# Altium PCB VAMoS PCB RevB.PcbDoc (part 3 of 3)
Units mm, origin at the board's own origin, x right, y up, seen from the top; angles counter-clockwise.
Board outline 96.93 x 94.75 mm, 4 copper layers (Top Signal Layer, Power Plane, Ground Plane, Bottom Signal Layer), stack 1.66 mm thick; 217 components, 103 nets, 623 pads, 255 vias.
Unrouted connection lines stored in the file: 51.
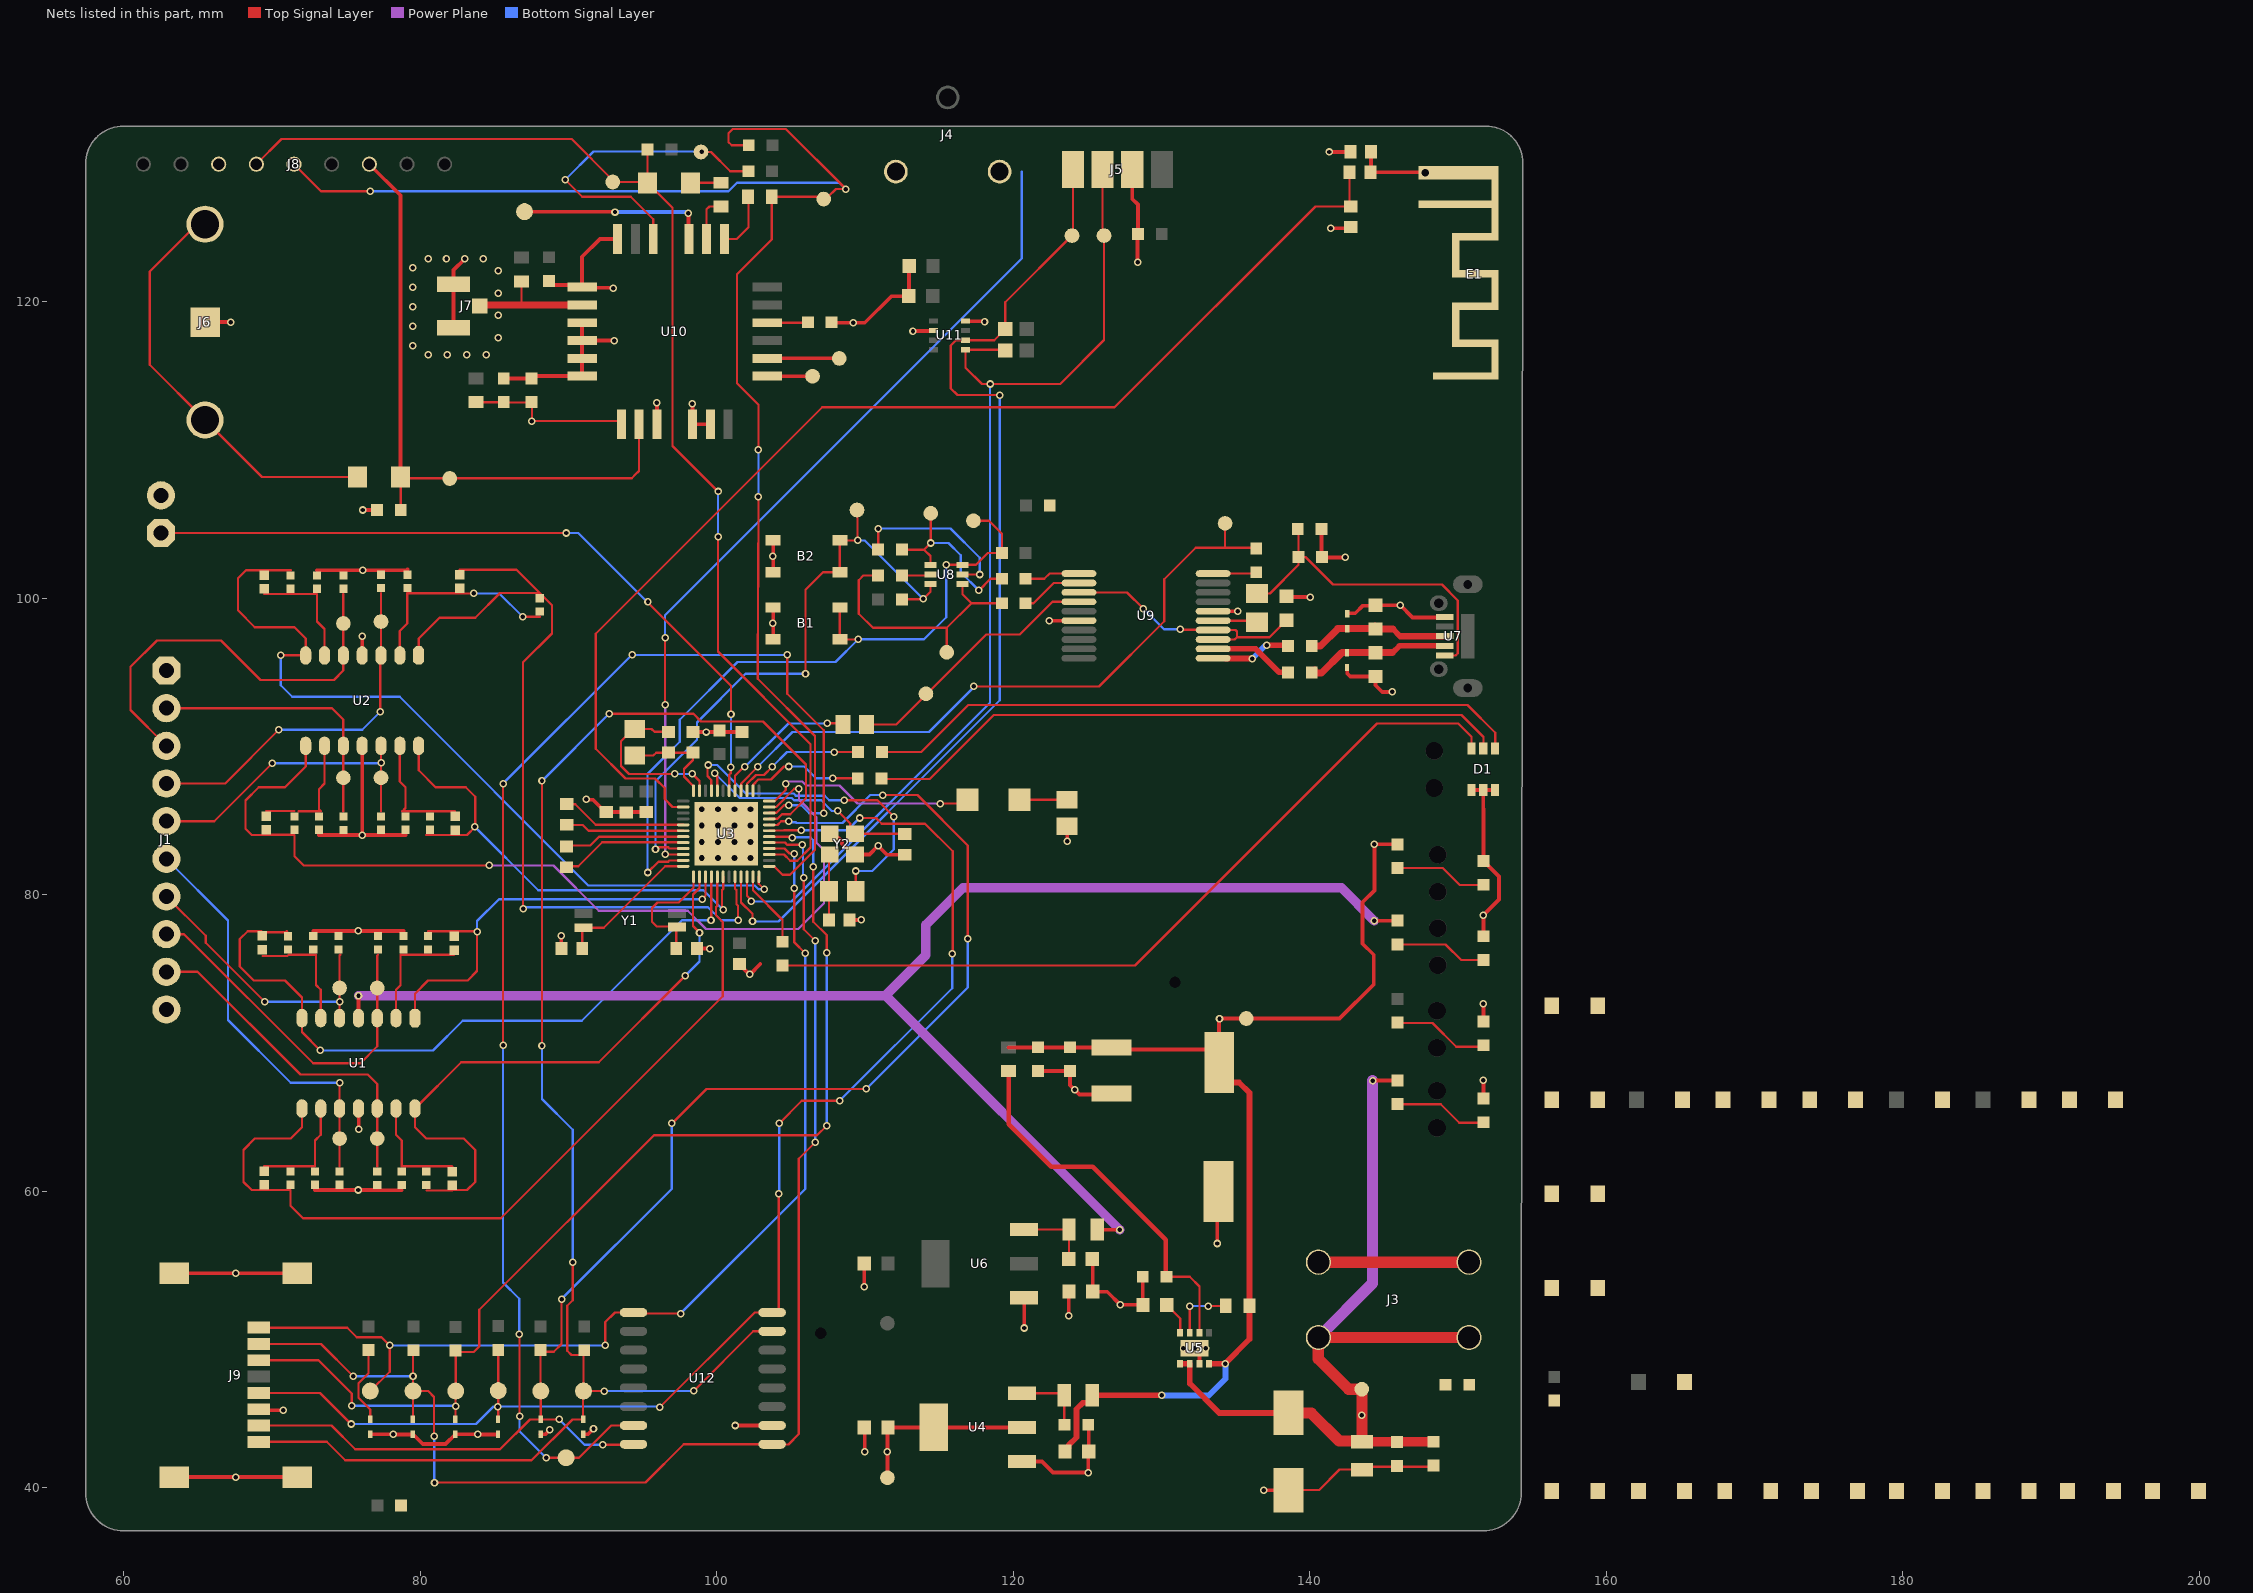
[diagram p4: the nets of this part, all layers, seen from the top]

## Via types
v1: diameter 0.508, hole 0.3, Top Signal Layer to Bottom Signal Layer, 238 vias
v2: diameter 0.7, hole 0.4, Top Signal Layer to Bottom Signal Layer, 16 vias
v3: diameter 0.7, hole 0.5, Top Signal Layer to Bottom Signal Layer, 1 vias

## Nets (pads, with @x,y where several pads share a name; then routed paths per layer and width w, separated by ;. In a path a pad name is that pad's centre, name@x,y a point inside that pad or via, vN(x,y) a via of type N, cw(c..) or ccw(c..) an arc to the next point about the centre after c; other vN are vias at no path point) (continued)
32K_XN: C16.2 U3.13 Y1.2 | length 8.3
  Top Signal Layer w0.152: C16.2@97.259,76.369 97.259,77.85 95.95,77.85 95.625,78.175 95.625,79.1 96,79.475 97.423,79.475 98.426,80.478 U3.13@98.426,81.216
32K_XP: C13.2 U3.12 Y1.1 | length 9.9
  Top Signal Layer w0.152: C13.2@90.912,76.369 90.912,77.687 Y1.1@90.999,77.774 92.374,77.774 96.516,81.916 U3.12@97.726,81.916
+5V: C22.2 C25.2 L2.1 R34.2 Tp9.1 U1.4 U2.4 U4.2 | length 116
  Top Signal Layer w0.254: U1.4@75.819,71.678 75.822,71.681 75.822,73.197 v1(75.825,73.2) ; U2.4@76.073,96.139 76.073,97.423 v1(76.075,97.425) ; Tp9.1@111.5,40.675 v1(111.5,42.425) 111.5,44.025 C22.2@111.544,44.069 U4.2@114.627,44.069 U4.2@120.577,44.069 ; v1(123.725,51.6) 123.725,53.2 C25.2@123.75,53.225 ; L2.1@125.652,57.416 125.668,57.4 v1(127.175,57.4) ; v1(144.325,78.25) R34.2@145.9,78.25
  Power Plane w0.635: v1(75.825,73.2) 111.375,73.2 ; v1(127.175,57.4) 111.375,73.2 ; v1(144.325,78.25) 143.227,79.348 143.227,79.377 142.128,80.475 116.6,80.475 114.1,77.975 114.1,75.925 111.375,73.2
+5V5: C17.2 C27.1 C28.2 C30.2 C31.2 L1.1 R33.2 R36.2 Tp11.1 U5.4 | length 79.1
  Top Signal Layer w0.254: 119.675,69.7 126.612,69.7 C28.2@126.615,69.697 126.752,69.56 133.006,69.56 C27.1@133.875,68.691 ; v1@133.875,71.65 C27.1@133.875,68.691 ; C27.1@133.879,68.687 C27.1@133.875,68.691 ; v1(133.9,71.65) Tp11.1@135.708,71.65 142,71.65 144.3,73.95 144.3,75.95 143.55,76.7 143.55,79.492 144.35,80.292 v1(144.35,83.4) R33.2@145.9,83.4
  Top Signal Layer w0.381: C17.2@123.475,42.45 123.735,42.71 123.735,42.885 124.25,43.4 124.25,45.3 124.675,45.725 125.104,45.725 125.323,45.944 L1.1@125.323,46.244 129.981,46.244 v1(130,46.225) ; U5.4@133.194,48.353 134.253,48.353 135.925,50.025 R36.2@135.925,52.275 135.925,66.641 135.227,67.339 134.688,67.339 133.879,68.148 C27.1@133.879,68.687
  Bottom Signal Layer w0.381: v1(130,46.225) 133.175,46.225 134.3,47.35 v1(134.3,48.35)
+12V: C19.1 C20.2 C21.2 C23.2 C55.2 D34.1 J3.2 R32.2 Tp10.1 U5.1 U5.2 | length 59.7
  Top Signal Layer w0.254: C20.2@143.474,43.15 C20.2@143.51,43.114 ; v1(144.225,67.45) 144.25,67.475 R32.2@145.9,67.475 ; C23.2@145.627,43.223 145.736,43.114 C23.2@145.9,42.95
  Top Signal Layer w0.381: U5.1@131.244,48.353 U5.2@131.894,48.353 ; U5.2@131.9,48.347 131.9,47.025 133.88,45.045 C19.1@138.557,45.045
  Top Signal Layer w0.635: C20.2@143.51,43.114 145.736,43.114 C21.2@148.161,43.114
  Top Signal Layer w0.762: C19.1@138.557,45.045 140.08,45.045 141.975,43.15 C20.2@143.474,43.15 ; Tp10.1@143.5,46.65 142.6,46.65 140.57,48.68 J3.2@140.57,50.135 J3.2@150.73,50.135 ; C20.2@143.51,43.114 v1(143.51,44.882) Tp10.1@143.51,46.65
  Power Plane w0.762: J3.2@140.57,50.135 144.225,53.79 v1(144.225,67.45)
CHIP_PU: B2.2 B2.4 R44.1 Tp14.1 U3.9 U8.3 | length 43
  Top Signal Layer w0.152: v1(95.858,83.058) 95.999,83.199 96.709,83.199 96.791,83.116 U3.9@97.726,83.116 ; v1(105.975,94.9) 105.975,100.575 107.15,101.75 B2.4@108.292,101.75 B2.2@108.292,103.9 v1(109.5,103.9) 109.475,103.925 109.475,105.925 Tp14.1@109.45,105.95 ; R44.1@112.475,99.925 113.9,99.925 v1(113.925,99.95) 114.407,100.432 U8.3@114.407,100.95
  Bottom Signal Layer w0.152: v1(95.858,83.058) 95.858,87.658 98.65,90.45 98.65,91.625 101.925,94.9 v1(105.975,94.9) v1@106,94.9 ; v1(109.5,103.9) 109.975,103.9 v1(113.925,99.95)
DIFF90_N: C34.2 D7.2 R41.2 U7.2 | length 10.1
  Top Signal Layer w0.381: R41.2@140.119,94.996 140.201,95.078 140.329,95.206 R41.2@140.329,94.95 ; 145.575,96.325 146.039,96.789 U7.2@149.098,96.789
  Top Signal Layer w0.478: R41.2@140.329,94.95 140.775,94.95 142.15,96.325 D7.2@142.5,96.325 C34.2@144.425,96.325 145.575,96.325
DIFF90_P: C35.2 D8.2 R42.2 U7.3 | length 9.8
  Top Signal Layer w0.381: C35.2@144.4,97.925 C35.2@144.425,97.925 ; 145.6,97.925 146.086,97.439
  Top Signal Layer w0.417: 146.086,97.439 U7.3@149.098,97.439
  Top Signal Layer w0.478: R42.2@140.119,96.774 140.724,96.774 141.892,97.942 141.878,97.95 D8.2@142.525,97.95 C35.2@144.375,97.95 ; C35.2@144.4,98.125 144.6,97.925 145.6,97.925
DTR: R40.2 R47.1 Tp16.1 U8.1 | length 12.5
  Top Signal Layer w0.152: R40.2@112.475,103.275 113.975,103.275 ; U8.1@114.407,102.25 114.407,102.843 113.975,103.275 ; Tp16.1@114.425,105.725 v1(114.425,103.725) 113.975,103.275 ; v1(117.675,100.525) 118.46,101.31 R47.1@119.222,101.31
  Bottom Signal Layer w0.152: v1(114.425,103.725) 115.625,103.725 116.45,102.9 116.45,101.75 v1(117.675,100.525)
GND: B1.1 B1.3 B2.1 B2.3 C11.1 C13.1 C14.2 C15.2 C16.1 C17.1 C18.1 C19.2 C20.1 C21.1 C22.1 C23.1 C24.1 C25.1 C26.1 C27.2 C28.1 C29.1 C30.1 C31.1 C32.1 C33.1 C34.1 C35.1 C36.1 C37.1 C38.1 C39.1 C40.1 C41.1 C42.1 C43.1 C44.1 C44.2 C45.1 C46.2 C47.1 C48.1 C49.1 C50.1 C52.1 C53.1 C54.1 C55.1 C56.1 D1.1 D1.2 D1.3 D3.2 D4.2 D5.2 D6.2 D7.1 D8.1 D11.1 D12.1 D13.1 D14.1 D15.1 D16.1 D17.2 D18.2 D19.2 D20.2 D21.2 D22.2 D23.2 D24.2 D25.2 D26.2 D27.2 D28.2 D29.2 D30.2 D31.2 D32.2 D33.2 D34.2 D35.2 E1.1 J1.1 J1.10 J2.2 J3.1 J4.3 J5.2 J6.2 J7.GND J8.7 J9.6 J9.9 J9.10 J9.11 J9.12 L3.1 R1.1 R2.1 R3.1 R4.1 R5.1 R6.1 R7.1 R8.1 R13.1 R14.1 R15.1 R16.1 R17.1 R18.1 R19.1 R20.1 R30.1 R38.1 R53.1 U1.11 U2.11 U3.49 U4.1 U5.3 U6.1 U7.5 U9.6 U9.16 U10.1 U10.3 U10.4 U10.5 U10.6 U10.9 U10.10 U10.11 U10.24 U11.1 U11.7 U12.10 Y2.2 Y2.4 | length 234.4
  Top Signal Layer w0.152: C19.2@138.557,39.845 140.62,39.845 142,41.225 143.499,41.225 C20.1@143.51,41.214 143.721,41.425 148.15,41.425 C21.1@148.35,41.225
  Top Signal Layer w0.254: J9.10@63.388,40.718 v1(67.538,40.718) J9.9@71.688,40.718 ; J9.11@63.388,54.468 v1(67.538,54.468) J9.12@71.688,54.468 ; J6.2@65.475,118.625 v1(67.2,118.625) ; J9.6@69.088,45.298 69.161,45.225 v1(70.75,45.225) ; 72.771,77.558 74.474,77.558 v1(75.807,77.558) 77.141,77.558 78.867,77.558 ; 72.898,60.083 74.536,60.083 74.549,60.07 ; 73.025,101.892 74.803,101.892 79.083,101.892 79.121,101.93 ; 73.152,84.036 v1@76.075,84.036 ; 74.549,60.083 v1(75.813,60.083) 77.076,60.083 77.089,60.07 78.74,60.07 ; U1.11@75.819,65.582 75.835,65.566 75.835,64.19 v1(75.85,64.175) ; U2.11@76.073,90.043 U2.11@76.073,90.043 76.074,84.037 v1@76.075,84.036 ; v1(76.1,105.95) C38.1@77.075,105.95 ; D16.1@76.623,43.611 78.164,43.611 v1(78.175,43.6) 79.482,43.6 D15.1@79.493,43.611 80.16,42.944 81.697,42.944 D14.1@82.364,43.611 83.864,43.611 v1(83.875,43.6) 85.223,43.6 D13.1@85.234,43.611 ; 78.994,84.036 77.343,84.036 v1@76.075,84.036 ; J7.GND@82.231,118.236 J7.GND@82.231,121.186 82.231,122.131 v1(83,122.9) ; C41.1@85.625,114.825 C40.1@87.5,114.825 87.658,114.983 U10.6@90.905,114.983 U10.5@90.905,116.183 U10.4@90.905,117.383 ; D12.1@88.105,43.611 88.436,43.611 v1(88.725,43.9) ; C52.1@88.675,121.4 88.948,121.127 90.761,121.127 U10.1@90.905,120.983 ; v1(89.5,77.225) 89.5,76.381 C13.1@89.512,76.369 ; U10.3@90.905,118.583 U10.4@90.905,117.383 ; D11.1@90.975,43.611 91.311,43.611 v1(91.675,43.975) ; v1(91.175,86.45) 91.224,86.401 91.649,86.401 92.525,85.525 C45.1@92.55,85.55 ; C45.1@92.525,85.575 C48.1@95.225,85.575 ; v1(93,120.9) 92.959,120.941 90.947,120.941 U10.1@90.905,120.983 ; v1(93.075,117.375) 93.071,117.379 90.909,117.379 U10.4@90.905,117.383 ; U10.24@93.305,124.233 92.108,124.233 90.905,123.03 U10.1@90.905,120.983 ; v1(95.95,113.2) 95.95,111.738 U10.9@95.955,111.733 U10.9@95.955,112.444 ; v1(98.35,113.125) 98.35,111.738 U10.10@98.355,111.733 U10.11@99.555,111.733 ; C11.1@98.39,90.985 100.168,90.985 C49.1@101.692,90.985 ; C16.1@98.659,76.369 v1(99.519,76.369) ; v1(101.225,44.2) U12.10@103.725,44.2 ; C50.1@101.524,75.326 101.524,75.301 102.195,74.63 v1(102.225,74.63) 102.921,75.326 ; B1.3@103.792,97.223 B1.1@103.792,99.373 ; B2.3@103.792,101.75 B2.1@103.792,103.9 ; Y2.4@107.611,84.116 107.911,84.116 108.434,83.593 108.434,83.435 109.153,82.716 Y2.2@109.311,82.716 110.291,82.716 v1(110.875,83.3) 111.482,82.693 C15.2@112.68,82.693 ; R53.1@107.734,118.618 107.777,118.575 v1(109.2,118.575) 109.975,118.575 111.775,120.375 C39.1@112.95,120.375 112.95,122.375 C42.1@112.975,122.4 ; C14.2@108.95,78.3 v1(109.75,78.3) ; C22.1@109.944,44.069 109.975,44.038 v1(109.975,42.425) ; C29.1@109.944,55.118 109.944,53.556 v1(109.95,53.55) ; v1(113.225,118) 113.252,118.027 114.595,118.027 U11.7@114.622,118.054 ; U11.1@116.772,118.704 116.799,118.677 118.023,118.677 v1(118.05,118.65) ; U4.1@120.577,41.769 121.931,41.769 122.675,41.025 v1(125.05,41.025) 125.05,42.425 C17.1@125.075,42.45 125.075,44.225 C18.1@125.05,44.25 ; U6.1@120.704,52.818 120.725,52.797 v1(120.725,50.775) ; C31.1@121.662,68.109 C30.1@123.821,68.109 123.821,67.154 124.45,66.525 126.543,66.525 C28.1@126.615,66.597 ; v1(122.425,98.475) 122.439,98.489 U9.6@124.419,98.489 ; R30.1@123.613,84.613 123.625,84.601 v1(123.625,83.6) ; C26.1@125.325,55.425 125.35,55.4 C25.1@125.35,53.225 126.325,53.225 v1(127.213,52.337) 128.727,52.337 R38.1@128.727,54.229 ; J5.2@128.016,128.905 128.016,126.934 128.4,126.55 C37.1@128.4,124.575 128.375,124.55 v1(128.375,122.675) ; U5.3@132.219,49.403 132.544,49.078 U5.3@132.544,48.353 ; U9.16@133.469,99.123 135.123,99.123 v1(135.125,99.125) ; v1(133.75,56.475) 133.75,59.908 C27.2@133.829,59.987 ; v1(136.875,39.825) 138.537,39.825 C19.2@138.557,39.845 ; C36.1@138.425,100.125 138.475,100.075 v1(140.025,100.075) ; C32.1@140.775,104.675 140.775,102.825 C33.1@140.825,102.775 140.85,102.75 v1(142.375,102.75) ; v1(141.3,130.1) 142.7,130.1 C44.2@142.725,130.125 ; v1(141.4,124.95) 142.668,124.95 L3.1@142.748,125.03 ; D7.1@142.5,95.325 142.5,95.225 142.523,95.202 142.523,94.927 142.725,94.725 C34.1@144.425,94.725 144.425,94.125 144.875,93.675 145.525,93.675 v1(145.55,93.7) ; D8.1@142.525,98.95 142.525,98.958 142.548,98.981 143.056,98.981 143.575,99.5 144.4,99.5 C35.1@144.425,99.525 v1(146.1,99.525) 146.925,98.7 149.059,98.7 U7.5@149.098,98.739 ; C44.1@144.125,130.125 144.125,128.775 C46.2@144.075,128.725 E1.1@147.783,128.725 ; E1.1@149.771,128.7 E1.1@149.783,128.688 ; D1.1@150.892,87.07 D1.2@151.692,87.07 ; D3.2@151.7,66.25 v1(151.7,67.5) ; D6.2@151.7,71.45 v1(151.7,72.65) ; D5.2@151.7,77.2 v1(151.7,78.625) 152.75,79.675 152.75,81.225 D4.2@151.7,82.275 151.7,85.775 151.696,85.779 151.696,87.066 D1.2@151.692,87.07 ; D1.3@152.492,87.07 D1.2@151.692,87.07
  Top Signal Layer w0.762: J3.1@140.57,55.215 J3.1@150.73,55.215
  other v1: 124.136,66.84 76.075,84 99.275,90.975 103.769,98.3 76.1,101.875 103.769,102.827 80.517,116.425 81.825,116.425 83.133,116.425 84.442,116.425 79.475,117.038 85.25,117.575 79.475,118.35 85.25,119.075 79.475,119.663 85.25,120.575 79.475,120.975 85.25,122.075 79.475,122.288 80.517,122.9 81.758,122.9 84.242,122.9
  other v2: 98.976,82.466 100.076,82.466 101.176,82.466 102.276,82.466 98.976,83.566 100.076,83.566 101.176,83.566 102.276,83.566 98.976,84.666 100.076,84.666 101.176,84.666 102.276,84.666 98.976,85.766 100.076,85.766 101.176,85.766 102.276,85.766
  other v3: 147.783,128.688
GPIO35: B1.2 B1.4 R43.1 Tp13.1 U3.11 U8.6 | length 49.4
  Top Signal Layer w0.152: v1(95.325,81.5) 96.058,82.233 96.709,82.233 96.791,82.316 U3.11@97.726,82.316 ; B1.2@108.292,99.373 B1.4@108.292,97.223 109.548,97.223 v1@109.55,97.225 ; v1(115.475,102.25) U8.6@116.557,102.25 117.475,102.25 118.275,103.05 R43.1@119.222,103.05 119.222,104.353 118.35,105.225 Tp13.1@117.3,105.225
  Bottom Signal Layer w0.152: v1(95.325,81.5) 95.325,88.15 97.5,90.325 97.5,91.8 101.392,95.692 107.992,95.692 v1(109.525,97.225) 113.975,97.225 115.475,98.725 v1(115.475,102.25)
GPS_1PPS: Tp23.1 U10.21 | length 12.8
  Top Signal Layer w0.254: Tp23.1@87.025,126.075 93.1,126.075 v1(93.125,126.05) ; v1(98.075,125.975) 98.09,125.96 98.09,124.248 U10.21@98.105,124.233
  Bottom Signal Layer w0.254: v1(93.125,126.05) 98,126.05 v1(98.075,125.975)
GPS_NRST: R48.1 Tp22.1 U10.22 | length 22.1
  Top Signal Layer w0.152: v1(89.775,128.225) 90.913,127.087 94.188,127.087 95.705,125.57 U10.22@95.705,124.233 ; Tp22.1@98.925,130.1 99.6,130.1 100.9,128.8 R48.1@102.125,128.8
  Bottom Signal Layer w0.152: v1(89.775,128.225) 91.675,130.125 v1(98.975,130.125)
I2C_SCL: D27.1 J5.3 R51.1 TP24.1 U3.22 U11.4 | length 71.4
  Top Signal Layer w0.152: U3.22@102.026,81.216 102.026,79.924 102.325,79.625 v1(102.325,79.55) ; R51.1@119.449,116.701 119.396,116.754 U11.4@116.772,116.754 116.772,115.553 117.875,114.45 v1(118.425,114.45) 123.15,114.45 126.111,117.411 TP24.1@126.111,124.46 126.016,124.555 J5.3@126.016,128.905
  Bottom Signal Layer w0.152: v1(102.325,79.55) 105.032,79.55 118.425,92.943 v1(118.425,114.45)
I2C_SDA: D28.1 J5.4 R50.1 TP25.1 U3.21 U11.3 | length 69.9
  Top Signal Layer w0.152: U3.21@101.626,81.216 101.626,79.483 102.4,78.709 v1(102.4,78.2) ; v1(119.075,113.7) 116.225,113.7 115.775,114.15 115.775,117.05 116.129,117.404 U11.3@116.772,117.404 118.704,117.404 R50.1@119.45,118.15 119.45,119.958 TP25.1@123.952,124.46 124.016,124.524 J5.4@124.016,128.905
  Bottom Signal Layer w0.152: v1(102.4,78.2) 104.15,78.2 119.075,93.125 v1(119.075,113.7)
INPUT_DRIVE: D33.1 J2.1 U3.42 | length 49.9
  Top Signal Layer w0.152: J2.1@62.5,104.4 v1(89.85,104.4) ; v1(95.35,99.775) 95.35,99.7 100.95,94.1 v1(100.95,92.175) ; U3.42@100.826,87.016 100.826,88.101 100.925,88.2 v1(100.925,88.6)
  Bottom Signal Layer w0.152: v1(89.85,104.4) 90.65,104.4 95.275,99.775 v1(95.35,99.775) ; v1@100.95,88.6 v1(100.95,92.175)
LED_G: R29.1 U3.23 | length 5.2
  Top Signal Layer w0.152: U3.23@102.426,81.216 102.426,80.299 104.425,78.3 R29.1@104.425,76.825
NetC1_1: C1.1 R1.2 R9.1 U1.13 | length 7.5
  Top Signal Layer w0.152: U1.13@78.359,65.582 78.359,63.804 78.74,63.423 78.74,61.683 80.391,61.683 82.117,61.683 C1.1@82.15,61.65
NetC1_2: C1.2 R9.2 U1.14 U3.14 | length 41
  Top Signal Layer w0.152: 80.424,60.05 82.15,60.05 82.183,60.083 83.147,60.083 83.693,60.629 83.693,62.788 82.931,63.55 80.391,63.55 79.629,64.312 U1.14@79.629,65.582 82.754,68.707 92.032,68.707 v1(97.85,74.525) ; v1@98.826,77.451 98.826,77.453 98.391,77.887 98.391,80.013 98.826,80.447 U3.14@98.826,81.216
  Bottom Signal Layer w0.152: v1(97.85,74.525) 98.825,75.5 v1(98.825,77.45)
NetC2_1: C2.1 R3.2 R10.1 U1.2 | length 8
  Top Signal Layer w0.152: U1.2@78.359,71.678 78.359,73.583 78.665,73.889 78.665,75.958 78.867,75.958 80.189,75.958 80.518,75.958 C2.1@82.242,75.958
NetC2_2: C2.2 R10.2 U1.1 U3.15 | length 30.6
  Top Signal Layer w0.152: U1.1@79.629,71.678 79.629,73.329 80.518,74.218 83.185,74.218 83.825,74.858 83.8,74.883 83.825,74.908 v1(83.825,77.5) ; 80.518,77.558 80.53,77.545 v1@83.825,77.545 ; v1(99,79.7) 99.226,79.926 U3.15@99.226,81.216
  Bottom Signal Layer w0.152: v1(83.825,77.5) 83.825,78.225 85.3,79.7 v1(99,79.7)
NetC3_1: C3.1 R5.2 R11.1 U1.6 | length 7.9
  Top Signal Layer w0.152: 69.35,75.875 71.037,75.875 ; 71.12,75.958 72.95,75.958 72.95,73.912 73.279,73.583 U1.6@73.279,71.678
NetC3_2: C3.2 R11.2 U1.7 U3.16 | length 47.4
  Top Signal Layer w0.152: 70.981,77.545 70.993,77.558 ; 71.037,77.475 69.35,77.475 69.28,77.545 68.351,77.545 67.818,77.012 67.818,75.157 68.757,74.218 70.866,74.218 72.009,73.075 U1.7@72.009,71.678 72.009,70.741 v1(73.25,69.5) ; v1(99.6,78.275) 99.626,78.301 U3.16@99.626,81.216
  Bottom Signal Layer w0.152: v1(73.25,69.5) 80.85,69.5 82.85,71.5 90.875,71.5 97.65,78.275 v1(99.6,78.275)
NetC4_1: C4.1 R7.2 R12.1 U1.9 | length 7.5
  Top Signal Layer w0.152: 69.469,61.683 71.247,61.683 71.971,61.683 72.898,61.683 72.898,63.423 73.279,63.804 U1.9@73.279,65.582
NetC4_2: C4.2 R12.2 U1.8 U3.17 | length 56.5
  Top Signal Layer w0.152: U1.8@72.009,65.582 72.009,64.312 71.247,63.55 68.834,63.55 68.072,62.788 68.072,60.629 68.618,60.083 69.469,60.083 71.235,60.083 71.235,59.015 72.075,58.175 85.426,58.175 100.4,73.149 100.4,78.157 99.942,78.615 99.942,79.175 100.026,79.258 U3.17@100.026,81.216
NetC5_1: C5.1 R13.2 R21.1 U2.13 | length 8.2
  Top Signal Layer w0.152: U2.13@78.613,90.043 78.613,87.63 78.994,87.249 78.994,85.848 78.782,85.636 78.994,85.636 80.391,85.636 80.645,85.636 82.339,85.636
NetC5_2: C5.2 R21.2 U2.14 U3.18 | length 33.1
  Top Signal Layer w0.152: U2.14@79.883,90.043 79.883,88.392 81.026,87.249 83.058,87.249 83.693,86.614 83.693,84.582 83.147,84.036 82.361,84.036 82.35,84.025 80.656,84.025 ; 80.391,84.036 80.645,84.036 ; v1(100.425,78.975) 100.342,79.058 100.342,80.325 100.426,80.408 U3.18@100.426,81.216
  Bottom Signal Layer w0.152: v1(83.675,84.575) 87.95,80.3 99.1,80.3 v1(100.425,78.975)
NetC6_1: C6.1 R15.2 R22.1 U2.2 | length 14
  Top Signal Layer w0.152: U2.2@78.613,96.139 78.613,97.79 79.121,98.298 79.121,100.33 80.899,100.33 82.645,100.33 ; 82.65,100.325 v1(83.6,100.325) ; v1(86.9,98.75) 88.05,98.75
  Bottom Signal Layer w0.152: v1(83.6,100.325) 85.325,100.325 v1(86.9,98.75)
NetC6_2: C6.2 R22.2 U2.1 U3.20 | length 57
  Top Signal Layer w0.152: U2.1@79.883,96.139 79.883,97.282 81.28,98.679 83.693,98.679 85.364,100.35 88.05,100.35 ; 82.65,101.925 82.658,101.917 86.482,101.917 88.05,100.35 ; v1(86.925,79.05) 86.925,95.675 88.875,97.625 88.875,99.525 88.05,100.35 ; U3.20@101.226,81.216 101.226,80.406 101.321,80.311 101.321,79.357 101.429,79.25 v1(101.429,78.273)
  Bottom Signal Layer w0.152: v1(86.925,79.05) 87.033,79.158 99.4,79.158 100.284,78.273 v1(101.429,78.273)
NetC7_1: C7.1 R17.2 R23.1 U2.6 | length 7.9
  Top Signal Layer w0.152: 69.469,100.292 71.247,100.292 73.025,100.292 73.025,98.425 73.533,97.917 U2.6@73.533,96.139
NetC7_2: C7.2 R23.2 U2.7 U3.24 | length 55.5
  Top Signal Layer w0.152: v1(70.575,96.15) U2.7@72.252,96.15 ; 71.247,101.892 68.237,101.892 67.691,101.346 67.691,99.187 68.834,98.044 71.501,98.044 72.263,97.282 U2.7@72.263,96.139 ; U3.24@102.826,81.216 102.826,80.749 v1(103.2,80.375)
  Bottom Signal Layer w0.152: v1(70.575,96.15) 70.575,94.125 71.35,93.35 78.6,93.35 91.325,80.625 102.55,80.625 102.8,80.375 v1(103.2,80.375)
NetC8_1: C8.1 R19.2 R24.1 U2.9 | length 8
  Top Signal Layer w0.152: 69.6,85.65 71.487,85.65 ; 71.79,85.623 73.296,85.623 73.152,85.768 73.152,87.122 73.533,87.503 U2.9@73.533,90.043
NetC8_2: C8.2 R24.2 U2.8 U3.35 | length 62.6
  Top Signal Layer w0.152: 71.475,84.05 69.6,84.05 69.586,84.036 68.618,84.036 68.199,84.455 68.199,86.36 69.088,87.249 70.866,87.249 72.263,88.646 U2.8@72.263,90.043 ; 71.501,84.023 71.5,84.022 71.5,82.6 72.125,81.975 v1(84.65,81.975) ; U3.35@103.526,85.916 103.535,85.925 103.994,85.925 105.223,87.154 v1(105.53,87.154)
  Power Plane w0.152: v1(84.65,81.975) 88.975,81.975 92.025,78.925 98.032,78.925 99.265,77.692 105.492,77.692 107.225,79.425 107.225,83 106.7,83.525 106.7,85.25 105.53,86.42 v1(105.53,87.154)
NetC9_1: C9.1 U3.5 | length 8.4
  Top Signal Layer w0.152: C9.1@89.875,86.1 90.45,86.1 91.834,84.716 U3.5@97.726,84.716
NetC9_2: C9.2 U3.6 | length 8
  Top Signal Layer w0.152: C9.2@89.875,84.7 90.95,84.7 91.334,84.316 U3.6@97.726,84.316
NetC10_1: C10.1 U3.8 | length 8.6
  Top Signal Layer w0.152: C10.1@89.85,81.925 90.65,81.925 92.266,83.541 97.701,83.541 U3.8@97.726,83.516
NetC10_2: C10.2 U3.7 | length 8.1
  Top Signal Layer w0.152: C10.2@89.85,83.325 91.45,83.325 92.041,83.916 U3.7@97.726,83.916
NetC11_2: C11.2 C12.2 R25.1 U3.48 | length 7.1
  Top Signal Layer w0.152: R25.1@94.453,89.385 95.71,89.385 95.91,89.585 C12.2@96.739,89.585 C11.2@98.39,89.585 98.39,89.09 97.775,88.475 97.775,87.975 98.426,87.324 U3.48@98.426,87.016
NetC12_1: C12.1 R25.2 U3.47 | length 11.7
  Top Signal Layer w0.152: C12.1@96.739,90.985 95.79,90.985 95.59,91.185 R25.2@94.453,91.185 94.353,91.185 93.524,90.356 93.524,88.69 94.065,88.15 v1(97.15,88.15) ; v1(98.35,88.15) 98.826,87.674 U3.47@98.826,87.016
  Bottom Signal Layer w0.152: v1(97.15,88.15) v1(98.35,88.15)
NetC14_1: C14.1 R31.2 Y2.1 | length 4.4
  Top Signal Layer w0.152: C14.1@107.55,78.3 107.561,78.311 R31.2@107.561,80.241 107.561,82.666 Y2.1@107.611,82.716
NetC18_2: C18.2 L1.2 U4.3 | length 4.9
  Top Signal Layer w0.152: U4.3@120.577,46.369 123.297,46.369 L1.2@123.422,46.244 123.422,44.278 C18.2@123.45,44.25
NetC24_2: C24.2 U5.8 | length 2.3
  Top Signal Layer w0.152: C24.2@130.34,52.324 130.34,52.299 130.714,51.925 130.739,51.925 131.244,51.42 U5.8@131.244,50.453
NetC26_2: C26.2 L2.2 U6.3 | length 5.1
  Top Signal Layer w0.152: U6.3@120.704,57.418 123.75,57.418 L2.2@123.752,57.416 123.752,55.451 C26.2@123.725,55.425
NetC32_2: C32.2 C33.2 D25.1 FB1.1 U7.1 | length 22.5
  Top Signal Layer w0.152: FB1.1@136.425,100.325 137.3,100.325 139.225,102.25 C33.2@139.225,102.775 ; C32.2@139.175,104.675 139.225,104.625 C33.2@139.225,102.775 ; U7.1@149.098,96.139 149.814,96.139 149.972,96.297 149.972,99.853 148.9,100.925 141.555,100.925 139.705,102.775 C33.2@139.225,102.775
NetC36_2: C36.2 U9.3 U9.13 U9.14 | length 17.6
  Top Signal Layer w0.152: U9.3@124.419,100.393 127.656,100.393 v1(128.75,99.3) ; v1(131.25,97.9) 131.273,97.877 133.446,97.877 U9.14@133.469,97.853 134.972,97.853 135.075,97.75 135.075,97.375 ; U9.13@133.469,97.218 134.919,97.218 135.075,97.375 ; C36.2@138.425,98.525 138.4,98.525 138.026,98.151 138.026,98.126 137.275,97.375 135.075,97.375
  Bottom Signal Layer w0.152: v1(128.75,99.3) 130.15,97.9 v1(131.25,97.9)
NetC40_2: C40.2 C41.2 L4.2 U10.7 | length 11.2
  Top Signal Layer w0.152: L4.2@83.75,113.225 C41.2@85.625,113.225 ; C41.2@85.65,113.2 C40.2@87.5,113.2 ; C40.2@87.525,113.2 v1(87.525,111.95) U10.7@93.382,111.95
  Top Signal Layer w0.254: C41.2@85.625,113.225 C41.2@85.65,113.2 ; C40.2@87.5,113.2 C40.2@87.5,113.225 C40.2@87.525,113.2 ; U10.7@93.382,111.95 93.555,111.777 U10.7@93.555,111.733
NetC46_1: C46.1 L3.2 U3.2 | length 80.9
  Top Signal Layer w0.152: U3.2@97.726,85.916 97.009,85.916 96.475,86.45 96.475,87.2 95.83,87.845 93.83,87.845 91.825,89.85 91.825,97.6 107.1,112.875 126.825,112.875 140.38,126.43 L3.2@142.748,126.43 142.675,126.503 C46.1@142.675,128.725
NetD1_4: D1.4 R27.2 | length 44.4
  Top Signal Layer w0.152: R27.2@111.275,89.635 113.785,89.635 116.95,92.8 150.625,92.8 152.492,90.933 D1.4@152.492,89.87
NetD1_5: D1.5 R28.2 | length 44
  Top Signal Layer w0.152: R28.2@111.2,87.8 114.35,87.8 118.675,92.125 150.22,92.125 151.7,90.645 151.7,90.194 151.493,90.194 151.692,89.995 D1.5@151.692,89.87
NetD1_6: D1.6 R29.2 | length 54.4
  Top Signal Layer w0.152: R29.2@104.425,75.225 128.2,75.225 144.525,91.55 150,91.55 150.892,90.658 D1.6@150.892,89.87
NetD2_1: D2.1 U3.36 | length 14.9
  Top Signal Layer w0.152: U3.36@103.526,86.316 103.903,86.316 104.65,87.063 v1(104.65,87.5) ; v1(115.075,86.15) 116.658,86.15 D2.1@116.91,86.402
  Power Plane w0.152: v1(104.65,87.5) 104.787,87.637 105.755,87.637 106.03,87.362 108.271,87.362 109.482,86.15 v1(115.075,86.15)
NetD2_2: D2.2 R30.2 | length 3.2
  Top Signal Layer w0.152: D2.2@120.41,86.402 123.602,86.402 R30.2@123.613,86.413
NetD3_1: D3.1 R32.1 | length 6.3
  Top Signal Layer w0.152: R32.1@145.9,65.875 148.825,65.875 150.075,64.625 151.675,64.625 D3.1@151.7,64.65
NetD4_1: D4.1 R33.1 | length 6.3
  Top Signal Layer w0.152: R33.1@145.9,81.8 148.95,81.8 150.1,80.65 151.675,80.65 D4.1@151.7,80.675
NetD5_1: D5.1 R34.1 | length 6.2
  Top Signal Layer w0.152: R34.1@145.9,76.65 149.15,76.65 150.2,75.6 D5.1@151.7,75.6
NetD6_1: D6.1 R35.1 | length 6.5
  Top Signal Layer w0.152: R35.1@145.9,71.375 145.9,71.351 148.274,71.351 149.875,69.75 151.6,69.75 D6.1@151.7,69.85
NetD9_1: D9.1 J6.1 | length 28.5
  Top Signal Layer w0.152: J6.1@65.475,125.23 64.939,125.23 61.746,122.037 61.746,115.749 J6.1@65.475,112.02 69.32,108.175 D9.1@75.75,108.175
NetD10_1: D10.1 J8.6 R54.1 TP26.1 U3.27 | length 83.4
  Top Signal Layer w0.152: J8.6@68.935,129.275 70.635,130.975 90.2,130.975 92.975,128.2 TP26.1@92.975,128.075 95.265,128.075 D10.1@95.324,128.016 ; R54.1@95.325,130.275 95.324,130.274 D10.1@95.324,128.016 ; v1(100.075,104.15) 100.075,96.4 106.318,90.157 106.318,83.185 105.425,82.292 104.951,82.292 104.527,82.716 U3.27@103.526,82.716 ; v1(100.075,107.2) 97,110.275 97,126.34 D10.1@95.324,128.016
  Bottom Signal Layer w0.152: v1(100.075,104.15) v1(100.075,107.2)
NetD10_2: D10.2 R49.2 | length 2.1
  Top Signal Layer w0.152: D10.2@98.224,128.016 100.266,128.016 R49.2@100.275,128.025
NetD16_2: D16.2 R61.1 | length 5.2
  Top Signal Layer w0.152: R61.1@76.496,49.18 76.496,47.721 75.825,47.05 75.825,46.075 76.623,45.277 D16.2@76.623,44.611
NetD30_1: D30.1 J4.1 U3.10 | length 57.3
  Top Signal Layer w0.152: v1@96.5,82.725 v1(96.509,82.716) U3.10@97.726,82.716 ; v1(96.5,92.8) v1(96.5,97.325)
  Power Plane w0.152: v1@96.5,92.825 96.509,92.816 v1(96.509,82.716)
  Bottom Signal Layer w0.152: v1(96.5,97.325) 96.5,98.85 120.57,122.92 120.57,128.778
NetFB1_2: FB1.2 U9.15 | length 3
  Top Signal Layer w0.152: U9.15@133.469,98.489 FB1.2@136.316,98.489
  Top Signal Layer w0.381: FB1.2@136.316,98.489 FB1.2@136.425,98.38
NetJ7_SIG: J7.SIG L5.1 U10.2 | length 8.5
  Top Signal Layer w0.152: 86.8,119.783 86.825,119.808 L5.1@86.825,121.375
  Top Signal Layer w0.471: J7.SIG@84.006,119.711 84.078,119.783 86.8,119.783 U10.2@90.905,119.783
NetJ8_5: J8.5 R52.2 R55.1 TP27.1 U3.25 | length 106.6
  Top Signal Layer w0.152: J8.5@71.475,129.275 73.3,127.45 v1(76.625,127.45) ; R55.1@102.15,130.55 101,130.55 100.788,130.762 100.788,131.363 101.075,131.65 104.65,131.65 v1(108.7,127.6) 108.025,127.6 107.5,127.075 R52.2@103.7,127.075 103.7,124.2 101.35,121.85 101.35,114.5 102.8,113.05 v1(102.8,110) ; v1(102.8,106.85) 102.75,94.575 106.622,90.703 106.622,83.04 104.925,81.342 104.425,81.342 103.851,81.916 U3.25@103.526,81.916
  Bottom Signal Layer w0.152: v1(76.625,127.45) 100.775,127.45 101.35,128.025 108.275,128.025 v1(108.7,127.6) ; v1(102.8,106.85) v1(102.8,110)
NetR26_1: R26.1 U3.41 | length 9.8
  Top Signal Layer w0.152: U3.41@101.226,87.016 101.226,88.026 101.825,88.625 v1(101.875,88.625) ; v1(107.45,91.575) 108.4,91.575 R26.1@108.5,91.475
  Bottom Signal Layer w0.152: v1(101.875,88.625) 101.9,88.625 104.825,91.55 v1@107.45,91.55
NetR27_1: R27.1 U3.39 | length 8.8
  Top Signal Layer w0.152: U3.39@102.026,87.016 102.035,87.025 102.035,87.479 102.631,88.075 103.175,88.075 v1(103.725,88.625) ; v1(107.925,89.625) R27.1@109.525,89.625
  Bottom Signal Layer w0.152: v1(103.725,88.625) 104.725,89.625 v1(107.925,89.625)
NetR28_1: R28.1 U3.38 | length 8.3
  Top Signal Layer w0.152: U3.38@102.426,87.016 102.426,87.406 102.79,87.77 103.645,87.77 104.525,88.65 v1(104.85,88.65) ; v1(107.825,87.85) R28.1@109.5,87.85
  Bottom Signal Layer w0.152: v1(104.85,88.65) 105.889,88.65 106.689,87.85 v1(107.825,87.85)
NetR36_1: R36.1 U5.7 | length 4.3
  Top Signal Layer w0.152: v1@131.875,52.275 v1(131.894,52.256) U5.7@131.894,50.453 ; v1(133.144,52.256) 134.306,52.256 R36.1@134.325,52.275
  Bottom Signal Layer w0.152: v1(131.894,52.256) v1(133.144,52.256) v1@133.15,52.25
NetR37_1: R37.1 R38.2 U5.6 | length 25.9
  Top Signal Layer w0.152: R37.1@119.429,67.854 R37.1@119.675,68.1 ; R38.2@130.327,54.229 131.879,54.229 ; 131.896,54.229 132.544,53.581 U5.6@132.544,50.453
  Top Signal Layer w0.305: R37.1@119.675,68.1 119.675,64.525 122.55,61.65 125.35,61.65 130.275,56.725 130.275,54.281 R38.2@130.327,54.229
NetR39_2: R39.2 U8.2 | length 2
  Top Signal Layer w0.152: R39.2@112.475,101.525 114.332,101.525 U8.2@114.407,101.6
NetR40_1: R40.1 U8.5 | length 11.4
  Top Signal Layer w0.152: R40.1@110.875,103.275 v1(110.875,104.7) ; U8.5@116.557,101.6 v1(117.725,101.6)
  Bottom Signal Layer w0.152: v1(110.875,104.7) 115.75,104.7 117.725,102.725 v1(117.725,101.6)
NetR41_1: R41.1 U9.12 | length 4.9
  Top Signal Layer w0.381: U9.12@134.319,96.584 136.342,96.584 137.929,94.996 R41.1@138.519,94.996
NetR42_1: R42.1 U9.11 | length 4.9
  Top Signal Layer w0.152: U9.11@133.469,95.948 U9.11@133.478,95.939 ; v1@136.092,95.939 136.102,95.948 v1(136.12,95.93) ; R42.1@138.34,96.825 138.455,96.71 R42.1@138.519,96.774
  Top Signal Layer w0.381: U9.11@134.328,95.939 v1@136.092,95.939 ; v1(137.075,96.825) R42.1@138.34,96.825
  Bottom Signal Layer w0.152: v1@136.9,96.775 136.95,96.825 v1(137.075,96.825) v1@137.015,96.825
  Bottom Signal Layer w0.381: v1(136.12,95.93) v1@137.015,96.825
NetR45_2: R45.2 U9.20 | length 2.3
  Top Signal Layer w0.152: U9.20@134.319,101.663 R45.2@136.633,101.663
NetR46_2: R46.2 U9.2 | length 4.2
  Top Signal Layer w0.152: R46.2@120.822,99.659 120.824,99.661 121.361,99.661 122.728,101.028 U9.2@124.419,101.028
NetR47_2: R47.2 U9.1 | length 3.8
  Top Signal Layer w0.152: R47.2@120.822,101.31 122.085,101.31 122.45,101.675 124.408,101.675 U9.1@124.419,101.663
NetR49_1: R49.1 U10.20 | length 3
  Top Signal Layer w0.152: U10.20@99.305,124.233 99.305,126.23 99.5,126.425 R49.1@100.275,126.425
NetR52_1: R52.1 U10.19 | length 4
  Top Signal Layer w0.152: U10.19@100.505,124.233 101.333,124.233 102.125,125.025 102.125,127.05 R52.1@102.1,127.075
NetR53_2: R53.2 U10.16 | length 2.7
  Top Signal Layer w0.152: U10.16@103.405,118.583 106.099,118.583 R53.2@106.134,118.618
NetTP31_1: TP31.1 U3.34 U12.7 | length 92.1
  Top Signal Layer w0.152: v1@85.575,69.875 v1(85.575,87.5) ; v1(86.675,50.35) 86.681,50.344 86.681,44.831 86.675,44.825 v1(86.688,44.813) ; v1(88.475,42.025) TP31.1@89.825,42.025 90.7,42.025 92.875,44.2 U12.7@94.375,44.2 ; U3.34@103.526,85.516 103.535,85.525 104.025,85.525 104.529,86.029 v1(104.855,86.029) ; v1(104.75,96.175) 104.75,93.55 107.2,91.1 v1(107.2,85.5)
  Bottom Signal Layer w0.152: v1(85.575,69.85) 85.575,53.85 86.675,52.75 v1(86.675,50.35) ; v1(85.575,87.5) v1@94.25,96.175 ; v1(86.688,44.813) 86.688,43.812 v1(88.475,42.025) ; v1(94.275,96.2) v1@94.25,96.175 ; v1(104.75,96.175) v1@94.25,96.175 ; v1(104.855,86.029) 105.696,86.029 106.225,85.5 v1(107.2,85.5)
RTCM(RX): Tp20.1 U10.14 | length 4.8
  Top Signal Layer w0.254: U10.14@103.405,116.183 103.409,116.179 108.246,116.179 Tp20.1@108.25,116.175
RTCM(TX): Tp21.1 U10.13 | length 3
  Top Signal Layer w0.254: U10.13@103.405,114.983 103.409,114.979 106.446,114.979 Tp21.1@106.45,114.975
RTS: R39.1 R46.1 Tp15.1 U8.4 | length 17.6
  Top Signal Layer w0.152: R39.1@110.875,101.525 109.875,101.525 109.571,101.221 109.571,98.954 110.525,98 115.507,98 ; Tp15.1@115.5,96.35 115.5,97.993 115.507,98 ; U8.4@116.557,100.95 116.557,100.268 117.166,99.659 ; R46.1@119.222,99.659 117.166,99.659 ; 115.507,98 117.166,99.659
SCK/CLK: D13.2 J9.5 R58.1 TP30.1 U3.31 U12.16 | length 94.7
  Top Signal Layer w0.152: J9.5@69.088,46.398 73.227,46.398 v1(75.325,44.3) ; D13.2@85.234,44.611 85.25,44.627 TP30.1@85.25,46.55 R58.1@85.25,49.2 ; v1(96.15,45.425) 102.545,51.82 U12.16@103.725,51.82 103.968,51.82 104.175,52.027 v1(104.175,59.825) ; U3.31@103.526,84.316 103.535,84.325 104.5,84.325 104.529,84.354 v1(105.68,84.354) ; v1@104.2,64.575 105.725,66.1 v1(108.275,66.1) ; v1(109.625,85.175) 110.732,85.175 111.114,84.792 114.042,84.792 115.9,82.935 v1@115.9,76.025
  Bottom Signal Layer w0.152: v1(75.325,44.3) 83.75,44.3 84.925,45.475 v1(85.225,45.475) 96.1,45.475 v1(96.15,45.425) ; v1@104.2,59.825 v1(104.2,64.6) ; v1(105.68,84.354) 108.804,84.354 v1(109.625,85.175) ; v1(108.275,66.1) 115.875,73.7 v1(115.875,76.025)
"SCS/CMD MICROSD": D14.2 J9.3 R59.1 TP32.1 U3.30 | length 74.8
  Top Signal Layer w0.152: J9.3@69.088,48.598 73.127,48.598 75.375,46.35 v1(75.375,45.525) ; D14.2@82.364,44.611 82.364,46.503 TP32.1@82.385,46.524 82.385,49.14 82.375,49.15 83.6,49.15 83.975,49.525 83.975,52 95.758,63.783 106.758,63.783 v1(107.4,64.425) ; U3.30@103.594,83.916 103.603,83.907 105.027,83.907 v1(105.08,83.854) ; v1(106.5,81.9) 106.5,78.177 107.4,77.277 v1(107.4,76.075)
  Bottom Signal Layer w0.152: v1(75.375,45.525) 82.35,45.525 v1(82.375,45.5) ; v1(105.08,83.854) 105.098,83.872 106.303,83.872 106.5,83.675 v1@106.5,82.15 ; v1@107.375,64.4 v1(107.4,64.425) v1(107.4,76.075)
SD0: D12.2 J9.7 R57.1 TP29.1 U3.32 U12.8 | length 100.7
  Top Signal Layer w0.152: J9.7@69.088,44.198 74.002,44.198 75.609,42.591 85.366,42.591 87.386,44.611 D12.2@88.105,44.611 ; v1@89.375,44.625 v1(89.361,44.611) D12.2@88.105,44.611 ; v1(89.525,52.725) 89.525,49.7 89,49.175 88.105,49.175 88.1,49.18 88.1,46.544 TP29.1@88.12,46.524 88.12,44.626 D12.2@88.105,44.611 ; v1(92.3,42.9) 94.345,42.9 U12.8@94.375,42.93 ; v1@96.975,64.575 99.3,66.9 v1(110.075,66.9) ; U3.32@103.526,84.716 103.535,84.707 104.094,84.707 104.337,84.95 v1(104.85,84.95) ; v1(111.2,86.725) 113.525,86.725 116.925,83.325 v1(116.925,77.025)
  Bottom Signal Layer w0.152: v1(89.361,44.611) 91.072,42.9 v1(92.3,42.9) ; v1(89.525,52.725) 96.95,60.15 v1(96.95,64.575) ; v1(104.85,84.95) 104.915,84.885 105.333,84.885 105.375,84.842 108.467,84.842 110.35,86.725 v1(111.2,86.725) ; v1@110.1,66.925 116.925,73.75 v1(116.925,77.025)
SD1: D11.2 J9.8 R56.1 TP28.1 U3.33 U12.15 | length 109.6
  Top Signal Layer w0.152: J9.8@69.088,43.098 73.677,43.098 74.925,41.85 87.5,41.85 90.261,44.611 D11.2@90.975,44.611 90.975,46.499 TP28.1@91,46.524 ; v1(88.2,69.8) v1(88.2,87.675) ; v1(90.275,55.225) 90.275,52.65 89.9,52.275 89.9,49.239 90.189,48.95 90.825,48.95 91,49.125 TP28.1@91,46.524 ; v1(92.399,46.524) v1(92.399,46.524) TP28.1@91,46.524 ; v1(92.725,92.2) 98.425,92.2 98.933,91.692 103.108,91.692 106.013,88.787 106.013,86.504 104.941,85.433 104.388,85.433 104.081,85.125 103.535,85.125 U3.33@103.526,85.116 ; v1(98.45,46.55) 102.45,50.55 U12.15@103.725,50.55
  Bottom Signal Layer w0.152: v1(88.2,69.8) 88.2,66.225 90.275,64.15 v1(90.275,55.225) ; v1(88.2,87.675) v1(92.725,92.2) ; v1(92.399,46.524) 98.449,46.524 v1@98.45,46.525
SENSOR_IN_1: D17.1 J1.9 R2.2 Tp1.1 U1.12 | length 22.9
  Top Signal Layer w0.152: J1.9@62.865,74.803 64.972,74.803 71.907,67.868 76.454,67.868 77.089,67.233 U1.12@77.089,65.582 Tp1.1@77.089,63.55 77.089,61.67
SENSOR_IN_2: D19.1 J1.8 R4.2 Tp2.1 U1.3 | length 24.5
  Top Signal Layer w0.152: J1.8@62.865,77.343 64.057,77.343 72.764,68.636 75.952,68.636 77.089,69.773 U1.3@77.089,71.678 Tp2.1@77.089,73.71 77.089,75.906 77.141,75.958
SENSOR_IN_3: D21.1 J1.7 R6.2 TP4.1 U1.5 | length 19.2
  Top Signal Layer w0.152: J1.7@62.865,79.883 65.517,77.231 65.517,76.758 v1(69.5,72.775) ; U1.5@74.549,71.678 TP4.1@74.549,73.71 74.549,75.906 74.601,75.958
  Bottom Signal Layer w0.152: v1(69.5,72.775) v1(74.55,72.775)
SENSOR_IN_4: D23.1 J1.6 R8.2 TP3.1 U1.10 | length 27.6
  Top Signal Layer w0.152: 74.549,61.671 TP3.1@74.549,63.55 U1.10@74.549,65.582 74.549,67.18 74.475,67.254 74.546,67.325 v1(74.562,67.325)
  Bottom Signal Layer w0.152: J1.6@62.865,82.423 67.025,78.263 67.025,71.55 71.25,67.325 v1(74.562,67.325)
SENSOR_IN_5: D18.1 J1.5 R14.2 Tp5.1 U2.12 | length 20.5
  Top Signal Layer w0.152: J1.5@62.865,84.963 66.088,84.963 v1(70,88.875) ; 77.343,85.636 Tp5.1@77.343,87.884 U2.12@77.343,90.043
  Bottom Signal Layer w0.152: v1(70,88.875) 77.3,88.875 v1@77.325,88.9
  other v1: 77.35,88.9
SENSOR_IN_6: D20.1 J1.4 R16.2 TP8.1 U2.3 | length 24.4
  Top Signal Layer w0.152: J1.4@62.865,87.503 66.828,87.503 v1(70.446,91.121) ; v1(77.3,92.35) 77.3,96.096 U2.3@77.343,96.139 TP8.1@77.343,98.425 77.343,100.33
  Bottom Signal Layer w0.152: v1(70.446,91.121) 76.071,91.121 v1(77.3,92.35)
SENSOR_IN_7: D22.1 J1.3 R18.2 TP6.1 U2.5 | length 28
  Top Signal Layer w0.152: J1.3@62.865,90.043 60.452,92.456 60.452,95.377 62.23,97.155 66.548,97.155 69.215,94.488 74.168,94.488 74.803,95.123 U2.5@74.803,96.139 TP6.1@74.803,98.298 74.803,100.292
SENSOR_IN_8: D24.1 J1.2 R20.2 TP7.1 U2.10 | length 18.5
  Top Signal Layer w0.152: J1.2@62.865,92.583 74.041,92.583 74.803,91.821 U2.10@74.803,90.043 TP7.1@74.803,87.884 74.803,85.623
SHD/SD2: J9.1 TP34.1 U3.28 U12.1 | length 71.1
  Top Signal Layer w0.152: J9.1@69.088,50.798 75.058,50.798 75.702,50.154 77.371,50.154 v1(77.925,49.6) 77.925,47.826 TP34.1@76.623,46.524 ; v1(92.475,49.6) 92.475,51.175 93.12,51.82 U12.1@94.375,51.82 94.446,51.749 v1(97.551,51.749) ; U3.28@103.526,83.116 104.559,83.116 104.9,82.775 v1(105.225,82.775) ; v1(105.225,80.425) 105.225,76.775 v1(105.95,76.05)
  Bottom Signal Layer w0.152: v1(77.925,49.6) v1(92.475,49.6) v1@92.5,49.575 ; v1(97.551,51.749) 105.95,60.147 v1(105.95,76.05) ; v1(105.225,80.425) v1(105.225,82.775)
SWP/SD3: D15.2 J9.2 R60.1 TP33.1 U3.29 U12.9 | length 92.1
  Top Signal Layer w0.152: J9.2@69.088,49.698 73.302,49.698 v1(75.475,47.525) ; D15.2@79.493,44.611 79.503,44.621 TP33.1@79.503,46.524 ; R60.1@79.525,49.175 79.503,49.153 TP33.1@79.503,46.524 ; v1(80.925,43.475) 80.925,46.125 80.526,46.524 TP33.1@79.503,46.524 ; v1(80.95,40.35) 95.175,40.35 97.755,42.93 U12.9@103.725,42.93 103.73,42.925 104.825,42.925 105.525,43.625 105.525,62.2 v1(106.625,63.3) ; U3.29@103.526,83.516 104.59,83.516 104.734,83.371 105.746,83.371 v1(105.75,83.375) ; v1(105.85,81.15) 105.85,77.675 v1(106.625,76.9)
  Bottom Signal Layer w0.152: v1(75.475,47.525) v1(79.5,47.525) ; v1(80.925,43.475) 80.95,43.45 80.938,43.438 80.938,40.362 v1(80.95,40.35) ; v1(105.75,83.375) 105.8,83.325 105.8,81.2 v1(105.85,81.15) ; v1@106.6,63.3 106.625,63.325 v1(106.625,76.9)
U0RXD: R45.1 Tp17.1 U3.40 | length 45.2
  Top Signal Layer w0.152: U3.40@101.626,87.016 101.635,87.025 101.635,87.51 v1(102.75,88.625) ; v1(117.325,94.05) 125.775,94.05 130.175,98.45 130.175,101.275 132.3,103.4 134.312,103.4 ; Tp17.1@134.275,105.05 134.275,103.437 134.312,103.4 ; R45.1@136.375,103.35 136.325,103.4 134.312,103.4
  Bottom Signal Layer w0.152: v1(102.75,88.625) 105.1,90.975 114.3,90.975 v1@117.375,94.05
U0TXD: R26.2 Tp18.1 U9.4 | length 17.8
  Top Signal Layer w0.152: R26.2@110.1,91.475 112.1,91.475 118.175,97.55 120.425,97.55 122.634,99.758 U9.4@124.419,99.758
VBACKUP: C38.2 D9.2 D31.1 J8.3 TP19.1 U10.8 | length 43.6
  Top Signal Layer w0.152: C38.2@78.675,105.95 78.675,108.024 78.751,108.1 78.851,108.1 94.257,108.1 94.5,108.343 94.742,108.585 94.742,111.72 U10.8@94.755,111.733
  Top Signal Layer w0.254: J8.3@76.555,129.275 78.65,127.18 78.65,108.4 D9.2@78.851,108.199
XTAL_N: C15.1 U3.44 Y2.3 | length 16
  Top Signal Layer w0.152: v1(99.85,88.2) 100.026,88.024 U3.44@100.026,87.016 ; v1(108.15,85.65) 109,84.8 109,84.427 Y2.3@109.311,84.116 C15.1@112.657,84.116
  Bottom Signal Layer w0.152: v1(99.85,88.2) 101.533,86.517 105.05,86.517 105.2,86.367 107.033,86.367 107.75,85.65 v1(108.15,85.65)
XTAL_P: R31.1 U3.45 | length 22.5
  Top Signal Layer w0.152: v1(99.425,88.75) 99.37,88.695 99.37,88.001 99.626,87.745 U3.45@99.626,87.016 ; v1(108.575,86.375) 110.825,86.375 v1(111.925,85.275) ; R31.1@109.361,80.241 109.361,81.586 v1(109.375,81.6)
  Bottom Signal Layer w0.152: v1(99.425,88.75) 100.025,88.75 101.953,86.822 105.176,86.822 105.326,86.672 107.278,86.672 107.575,86.375 v1(108.575,86.375) ; v1(109.375,81.6) 110.475,81.6 111.925,83.05 v1(111.925,85.275)
pads on no net: J8.1 J8.2 J8.4 J8.9 R37.2 U5.5 U7.0 U7.4 U7.9 U9.5 U9.7 U9.8 U9.9 U9.10 U9.17 U9.18 U9.19 U10.12 U10.15 U10.17 U10.18 U10.23 U12.3 U12.4 U12.5 U12.6 U12.11 U12.12 U12.13 U12.14 Y1.3 Y1.4

## Polygon pours and split planes (outlines as drawn)
+5V on Top Signal Layer "+5V_L01_P016" (solid, remove dead copper, pour order 16): 77.65,99.225 77.65,70.1 74.55,70.1 74.55,99.225
+5V on Top Signal Layer "+5V_L01_P013" (solid, remove dead copper, pour order 13): 110.2,39.4 122.125,39.4 122.125,49.6 122.125,49.675 127.625,49.675 127.625,59.45 127.65,59.475 122.05,59.475 122.05,50.5 122.05,50.2 110.2,50.2 110.2,39.425
+12V on Top Signal Layer "+12V_L01_P012" (solid, remove dead copper, pour order 12): 152.325,51.825 139.125,51.825 139.125,48.85 130.45,48.85 130.45,42.15 152.425,42.15 152.425,51.825
3V3 on Power Plane "3V3_L02_P018" (solid, remove dead copper, pour order 18): 57.4,131.85 145.85,131.85 145.85,102.275 154.325,102.275 154.325,37.075 57.4,37.075
+5V on Power Plane "5V" (solid, pour order 14): 74.4,71.725 77.275,71.725 77.275,98.375 77.275,98.35 74.4,98.35
GND on Ground Plane "GND_L03_P020" (solid, remove dead copper, pour order 20): 57.45,131.8 145.85,131.8 145.85,114.075 145.85,102.05 154.325,102.05 154.325,37.075 57.4,37.075 57.4,131.85 145.85,131.85 145.85,131.75
no net on Bottom Signal Layer "Bottom Signal Layer-No Net" (solid, pour order 26): 57.4,131.85 145.85,131.85 145.85,102.275 154.325,102.275 154.325,37.075 57.4,37.075